# Altium PCB STM8P32.PcbDoc
Units mil, origin at the board's own origin, x right, y up, seen from the top; angles counter-clockwise.
Board outline 1305 x 1305 mil, 2 copper layers (Top Layer, Bottom Layer); 49 components, 75 nets, 205 pads, 0 vias.
Unrouted connection lines stored in the file: 77.
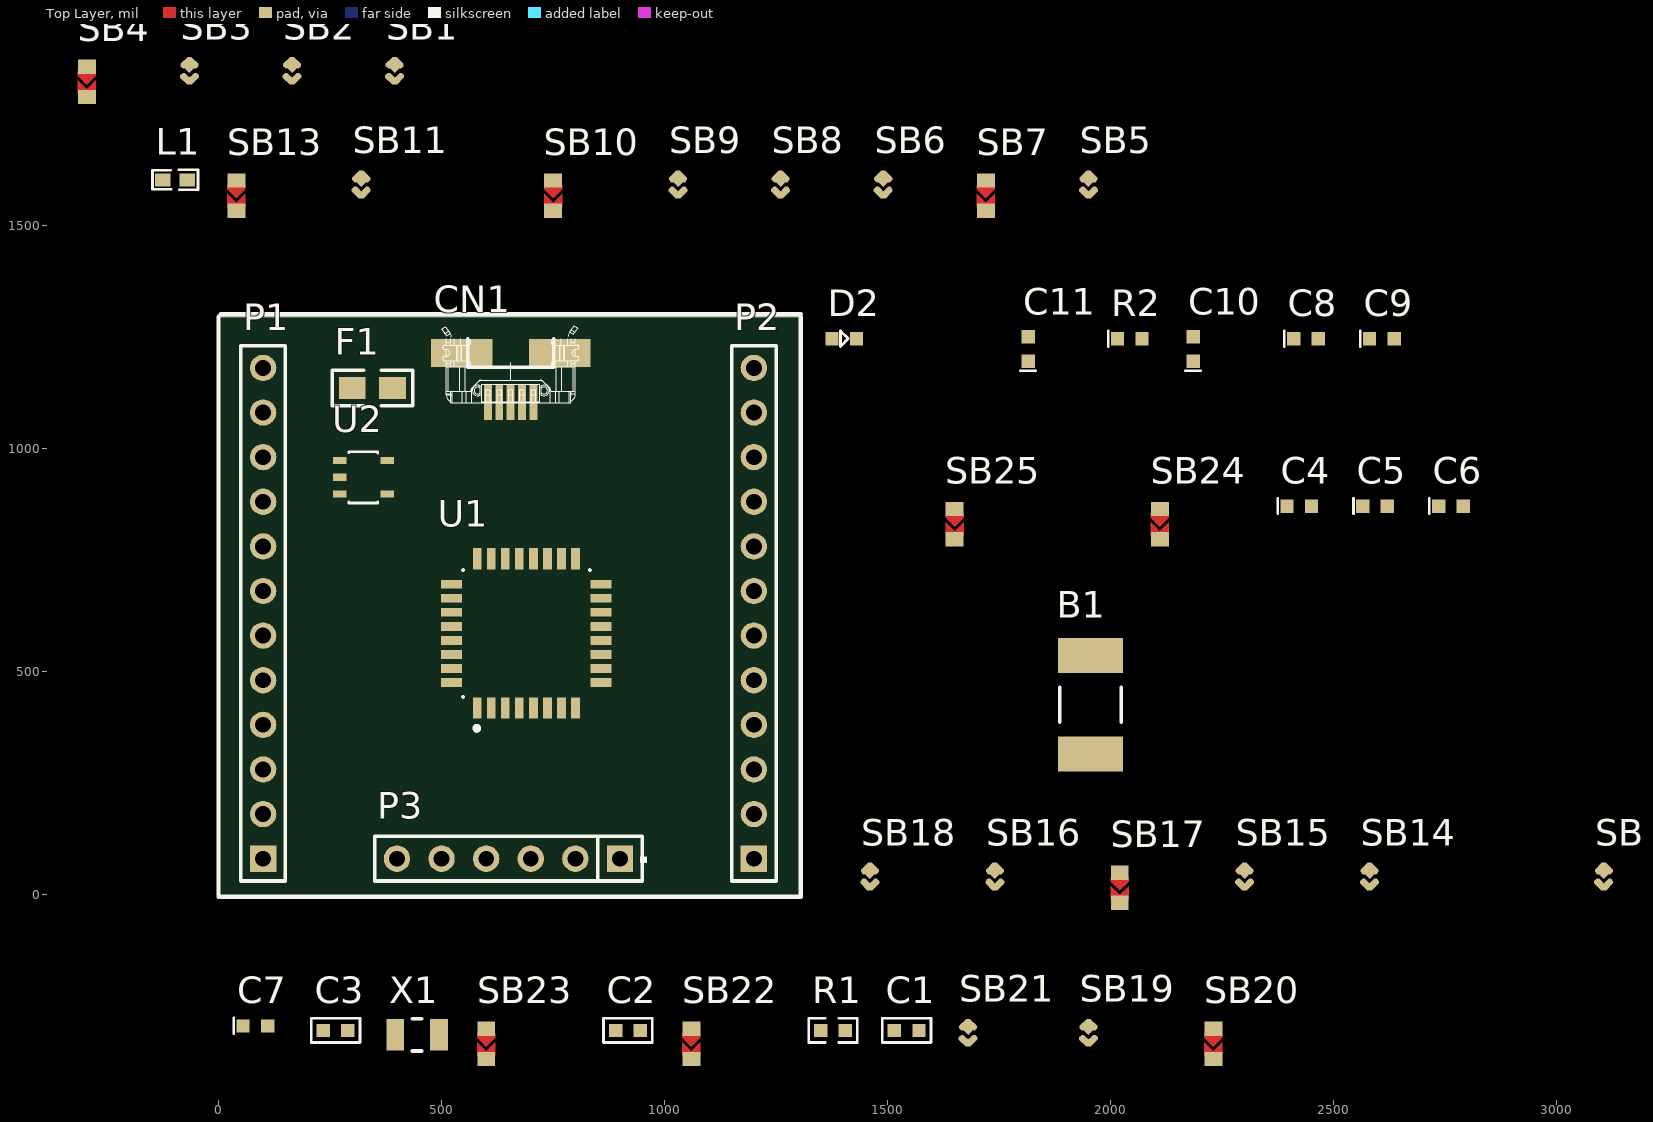
[diagram p0: Top Layer view]
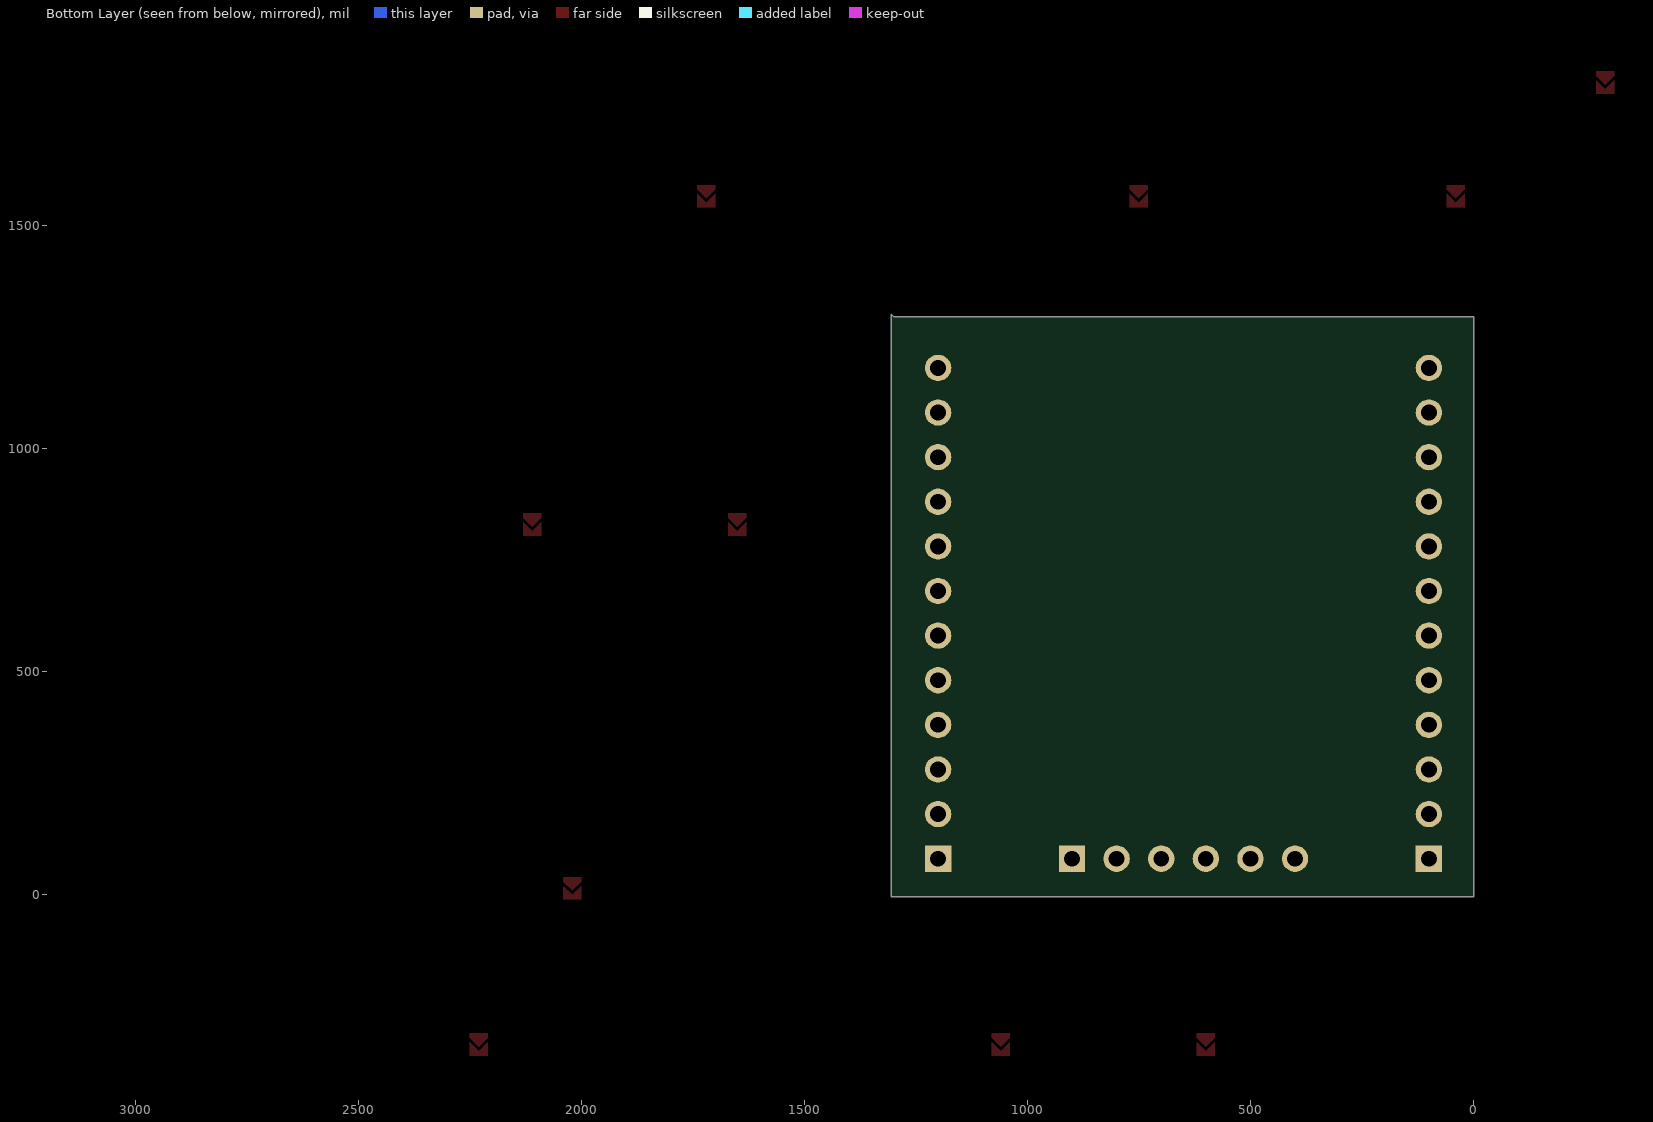
[diagram p1: Bottom Layer view, seen from below]

## Layer stack, top to bottom
Top Solder: solder mask 0.4, Solder Resist, Dk 3.5
Top Layer: signal copper 1.4
Dielectric 1: dielectric 12.6, FR-4, Dk 4.8
Bottom Layer: signal copper 1.4
Bottom Solder: solder mask 0.4, Solder Resist, Dk 3.5

## Board outline
0,-5 0,1295 1300,1295 1305,1300 1305,-5

## Design rules (kind name [scope] priority, off if disabled: settings)
Clearance [All] p1: gap=10
PolygonConnect [All] p1: connectstyle=Relief reliefconductorwidth=10 reliefentries=4 polygonreliefangle="90 Angle" airgapwidth=10
RoomDefinition STM32P32 [InComponentClass('STM32P32')] p1: confinementstyle=ConfineIn formatcopy=TRUE lockcomponents=FALSE outline -30,15 1305,15 1305,1345 -30,1345
RoutingVias [All] p1: holewidth=28 width=50 viastyle="Through Hole" minholewidth=28 minwidth=50 maxholewidth=28 maxwidth=50
SolderMaskExpansion [All] p1: expansion=4
Width [All] p1: maxlimit=10 minlimit=10 preferedwidth=10
30 further rules are at their usual default settings.

## Components (designator, comment, footprint, x,y, rotation, side; value= is the part's Value field where it differs from the comment)
B1 "KSS221G" SW2_5R6_5R5x3R1 1955,425 r90 top
C1 "100nF" 0603C 1515,-305 r0 top
C2 "4.3pF" 0603C 890,-305 r0 top
C3 "4.3pF" 0603C 235,-305 r0 top
C4 "1uF" 0603M 2395,870 r0 top
C5 "100nF" 0603M 2565,870 r0 top
C6 "100nF" 0603M 2735,870 r0 top
C7 "100nF" 0603M 55,-295 r0 top
C8 "1uF" 0603M 2410,1245 r0 top
C9 "0.1uF" 0603M 2580,1245 r0 top
C10 "0.1uF" 0603M 2185,1195 r90 top
C11 "1uF" 0603M 1815,1195 r90 top
CN1 "USB-Micro" USB-MICRO-Female-Lite 655,1210 r0 top
D2 "RED" 0603pn 1375,1245 r0 top
F1 "500mA" 0805 390,1135 r180 top
L1 "BEAD" 0603L -125,1601.25 r0 top
P1 "Synio Header-L 12-Pin" HDR1X12 100,80 r90 top locked
P2 "Synio Header-R 12-Pin" HDR1X12 1200,80 r90 top
P3 "Synio Power Header 6 Pin" HDR1X6/2.54MM 900,80 r180 top
R1 "10K" 0603R 1350,-305 r0 top
R2 "1K" 0603M 2015,1245 r0 top
SB1 "Circuit Breaker" JP2_SMD 395,1846.25 r90 top
SB2 "Circuit Breaker" JP2_SMD 165,1846.25 r90 top
SB3 "Circuit Breaker" JP2_SMD -65,1846.25 r90 top
SB4 "Circuit Breaker (open)" SB_0603 -295,1821.25 r90 top
SB5 "Circuit Breaker" JP2_SMD 1950,1591.25 r90 top
SB6 "Circuit Breaker" JP2_SMD 1490,1591.25 r90 top
SB7 "Circuit Breaker (close)" SB_0603 1720,1566.25 r90 top
SB8 "Circuit Breaker" JP2_SMD 1260,1591.25 r90 top
SB9 "Circuit Breaker" JP2_SMD 1030,1591.25 r90 top
SB10 "Circuit Breaker (close)" SB_0603 750,1566.25 r90 top
SB11 "Circuit Breaker" JP2_SMD 320,1591.25 r90 top
SB12 "Circuit Breaker" JP2_SMD 3105,40 r90 top
SB13 "Circuit Breaker (close)" SB_0603 40,1566.25 r90 top
SB14 "Circuit Breaker" JP2_SMD 2580,40 r90 top
SB15 "Circuit Breaker" JP2_SMD 2300,40 r90 top
SB16 "Circuit Breaker" JP2_SMD 1740,40 r90 top
SB17 "Circuit Breaker (open)" SB_0603 2020,15 r90 top
SB18 "Circuit Breaker" JP2_SMD 1460,40 r90 top
SB19 "Circuit Breaker" JP2_SMD 1950,-310 r90 top
SB20 "Circuit Breaker (close)" SB_0603 2230,-335 r90 top
SB21 "Circuit Breaker" JP2_SMD 1680,-310 r90 top
SB22 "Circuit Breaker" SB_0603 1060,-335 r90 top
SB23 "Circuit Breaker" SB_0603 600,-335 r90 top
SB24 "Circuit Breaker" SB_0603 2110,830 r90 top
SB25 "Circuit Breaker" SB_0603 1650,830 r90 top
U1 "MCU_LQFP32/QFN32" LQFP32_0R5_7x7 690,585 r0 top
U2 "LDO" SOT23-5L 325,935 r0 top
X1 "NX3215SA-32.768K-EXS00A-MU00525" XTAL_2SM_3R2X1R5 445,-315 r0 top

## Footprints (in the part's own frame and the unit in brackets; to place one, negate y for a bottom-side part, rotate by r counter-clockwise, add the part's x,y. Pads: shape width x height; smd on the part's side, far side on the other; paste and mask are expansions set on the pad)
0603C [mil]
  rect 30x30 smd: 1(0,0) 2(55,0)
  silkscreen extent -27,-27 82,27, body extent -4,-16 59,16, height 12
0603L [mil] "0603 LONG"
  rect 33.94x30 smd: 1(0,0) 2(55,0)
  silkscreen extent -23,-22 79,23
0603M [mil]
  rect 30x30 smd: 1(0,0) 2(55,0)
  silkscreen extent -21,-17 -21,18, body extent -5,-15 60,15, height 43
0603pn [mil]
  rect 30x30 smd: 1(0,0) 2(55,0)
  silkscreen extent 19,-17 36,18
0603R [mil]
  rect 30x30 smd: 1(0,0) 2(55,0)
  silkscreen extent -27,-27 82,27, body extent -4,-18 58,16, height 18
0805 [mil]
  rect 60x50 smd: 1(0,0) 2(90,0)
  silkscreen extent -45,-40 135,40
HDR1X6/2.54MM [mm] "Connector; Header; 6 Position"
  rect 1.5x1.5 hole 0.9: 1(0,0)
  round 1.5 hole 0.9: 2(2.54,0) 3(5.08,0) 4(7.62,0) 5(10.16,0) 6(12.7,0)
  silkscreen extent -1.52,-1.27 13.97,1.27, body extent -1.32,-1.5 13.92,1.42, height 8.51
HDR1X12 [mm] "Connector; Header; 12 Position"
  rect 1.5x1.5 hole 0.9: 1(0,0)
  round 1.5 hole 0.9: 2(2.54,0) 3(5.08,0) 4(7.62,0) 5(10.16,0) 6(12.7,0) 7(15.24,0) 8(17.78,0) 9(20.32,0) 10(22.86,0) 11(25.4,0) 12(27.94,0)
  silkscreen extent -1.27,-1.27 29.21,1.27
JP2_SMD [mil]
  oct 15x30 smd rot 45: 1(-18,-8) 2(18,7)
  oct 15.75x30 smd rot 135: 1(-18,8)
  rect 26x26 smd rot 45: 2(13,0)
  oct 15x30 smd rot 135: 2(18,-7)
LQFP32_0R5_7x7 [mm] "LQFP32 Recommended ,32 Pin MCU Size,7x7mm, Pitch, 0.8mm"
  rect 0.5x1.2 smd: 1(-2.8,-4.25) 2(-2,-4.25) 3(-1.2,-4.25) 4(-0.4,-4.25) 5(0.4,-4.25) 6(1.2,-4.25) 7(2,-4.25) 8(2.8,-4.25) 17(2.8,4.25) 18(2,4.25) 19(1.2,4.25) 20(0.4,4.25) 21(-0.4,4.25) 22(-1.2,4.25) 23(-2,4.25) 24(-2.8,4.25)
  rect 1.2x0.5 smd: 9(4.25,-2.8) 10(4.25,-2) 11(4.25,-1.2) 12(4.25,-0.4) 13(4.25,0.4) 14(4.25,1.2) 15(4.25,2) 16(4.25,2.8) 25(-4.25,2.8) 26(-4.25,2) 27(-4.25,1.2) 28(-4.25,0.4) 29(-4.25,-0.4) 30(-4.25,-1.2) 31(-4.25,-2) 32(-4.25,-2.8)
  silkscreen extent -3.62,-5.53 3.63,3.63, body extent -3.6,-3.6 3.6,3.6, height 1.6
SB_0603 [mil] "Jumper"
  rect 32x40 smd: 1(33.75,0) 2(-33.75,0)
  Top Layer region: -26.25,0 -16.25,0 3.75,-20 -26.25,-20
  Top Layer region: -26.25,0 -16.25,0 3.75,20 -26.25,20
  Top Layer region: 23.75,20 13.75,20 -6.25,0 13.75,-20 23.75,-20
SOT23-5L [mil] "Enhanced single channel power switches"
  rect 30x16 smd: 1(-53.15,37.4) 2(-53.15,0) 3(-53.15,-37.4) 4(53.15,-37.4) 5(53.15,37.4)
  silkscreen extent -33,-58 32,57, body extent -34,-59 34,59, height 57
SW2_5R6_5R5x3R1 [mm] "Subminiature Side Actuated Tact Switch for SMT"
  rect 2x3.7 smd: 1(-2.8,0) 2(2.8,0)
  silkscreen extent -1,-1.75 1,1.75, body extent -2.75,-2.7 2.75,1.75, height 1.65
USB-MICRO-Female-Lite [mm] "Connector; USB2.0, Type B, SM; 5 Position; Right Angle"
  rect 3.5x1.6 smd: 0(-2.802,0.088) 0(2.798,0.088)
  rect 0.45x2 smd: 1(1.298,-2.714) 2(0.648,-2.714) 3(-0.002,-2.714) 4(-0.652,-2.714) 5(-1.302,-2.714)
  silkscreen extent -3.92,-2.74 3.88,1.65
XTAL_2SM_3R2X1R5 [mm] "CRYSTAL 32.768KHZ 6PF SMD 2 pads"
  rect 1x1.8 smd: 1(-1.25,0) 2(1.25,0)
  silkscreen extent -0.28,-0.91 0.28,0.91, body extent -1.63,-0.75 1.58,0.75, height 0.89

## Part data
B1: library part SW-PB, "Switch"
C1 C2 C3 C4: library part CAP, "Capacitor"
C5 C6 C7 C8 C9 C10 C11: library part Cap, "Capacitor"
D2: library part LED0, "Typical INFRARED GaAs LED"
F1: library part "Fuse 1", "Fuse"
L1: library part Inductor, "Inductor"
P1: "Synio Header-L, 12-Pin"
P2: "Synio Header-R, 12-Pin"
R1: library part res1, "Resistor"
R2: library part Res2, "Resistor"
SB4 SB7 SB10 SB13 SB17 SB20: library part "Circuit Breaker", "Circuit Breaker"
U1: library part MCU_LQFP32
U2: library part LDO-SOT23-5, "General LDO SOT23-5"
X1: library part CRYSTAL_32K, "Crystal"

## Nets (pads, with @x,y where several pads share a name; then routed paths per layer and width w, separated by ;. In a path a pad name is that pad's centre, name@x,y a point inside that pad or via, vN(x,y) a via of type N, cw(c..) or ccw(c..) an arc to the next point about the centre after c; other vN are vias at no path point)
AVDD: L1.1 U1.5
BOOT0: R1.1 SB20.2
D3V3: C4.1 C5.1 C6.1 C7.1 R2.2
D5V: C10.2 C11.2 F1.1 U2.1 U2.3
EX_D3V3: P3.1
GND: B1.2 C1.1 C2.2 C3.2 C4.2 C5.2 C6.2 C7.2 C8.1 C9.1 C10.1 C11.1 CN1.0 CN1.5 D2.2 P1.1 P2.1 P3.2 R1.2 SB7.2 SB10.2 U2.2
NetC2_1: C2.1 SB23.1 X1.1
NetC3_1: C3.1 SB24.1 X1.2
NetC8_2: C8.2 C9.2 U2.5
NetCN1_1: CN1.1 F1.2
NetD2_1: D2.1 R2.1
NetL1_2: L1.2 SB13.1
NetP1_2: P1.2 SB9.1
NetP1_3: P1.3 SB8.1
NetP1_4: P1.4 SB6.1
NetP1_5: P1.5 SB5.1
NetP1_10: P1.10 SB3.1
NetP1_11: P1.11 SB2.1
NetP1_12: P1.12 SB1.1
NetP2_4: P2.4 SB21.1
NetP2_5: P2.5 SB19.1
NetP2_6: P2.6 SB18.1
NetP2_7: P2.7 SB16.1
NetP2_8: P2.8 SB15.1
NetP2_9: P2.9 SB14.1
NetP2_10: P2.10 SB12.1
NetP2_11: P2.11 SB11.1
NetSB4_1: SB4.1 SB17.1
NetSB7_1: SB7.1 U1.16
NetSB10_1: SB10.1 U1.32
NetSB17_2: SB17.2 SB22.2 SB23.2 U1.2
NetSB20_1: SB20.1 U1.31
NetSB25_2: SB25.2 U1.3
NRST: B1.1 C1.2 P3.5 U1.4
PA0: SB4.2 U1.6
PA0/CTS1: SB1.2 SB16.2
PA1: U1.7
PA1/RTS1: SB2.2 SB18.2
PA2: U1.8
PA2/TX1: SB15.2
PA3: U1.9
PA3/RX1: SB14.2
PA4: U1.10
PA4/SS: SB9.2 SB12.2
PA5: U1.11
PA5/SCK: SB8.2 SB11.2
PA6: U1.12
PA6/MISO: SB6.2 SB19.2
PA7: U1.13
PA7/MOSI: SB5.2 SB21.2
PA8: U1.18
PA9: U1.19
PA10: U1.20
PA11: U1.21
PA12: U1.22
PA13: U1.23
PA14: U1.24
PA15: U1.25
PB0: U1.14
PB1: U1.15
PB1/TIM3_CH4: P2.2 SB3.2
PB3: U1.26
PB4: U1.27
PB5: U1.28
PB6: U1.29
PB7: U1.30
PF0: SB22.1
PF1: SB25.1
RX1: P1.9
SCL1: P1.7
SDA1: P1.6
SWCLK: P3.4
SWDIO: P3.3
TX1: P1.8
VDD: SB13.2 U1.1 U1.17
pads on no net: CN1.2 CN1.3 CN1.4 P2.3 P2.12 P3.6 SB24.2 U2.4

## Silkscreen, mask and mechanical layers (free items; w line width, h text height)
Top Overlay:
  lines w10: 0,-5 0,1295 ; 5,-5 1305,-5 1305,1295 ; 5,1300 1305,1300